# Altium PCB l4.pcbdoc
Units mil, origin at the board's own origin, x right, y up, seen from the top; angles counter-clockwise.
Board outline 4455 x 3235 mil, 2 copper layers (Top Layer, Bottom Layer); 4 components, 5 nets, 16 pads, 0 vias.
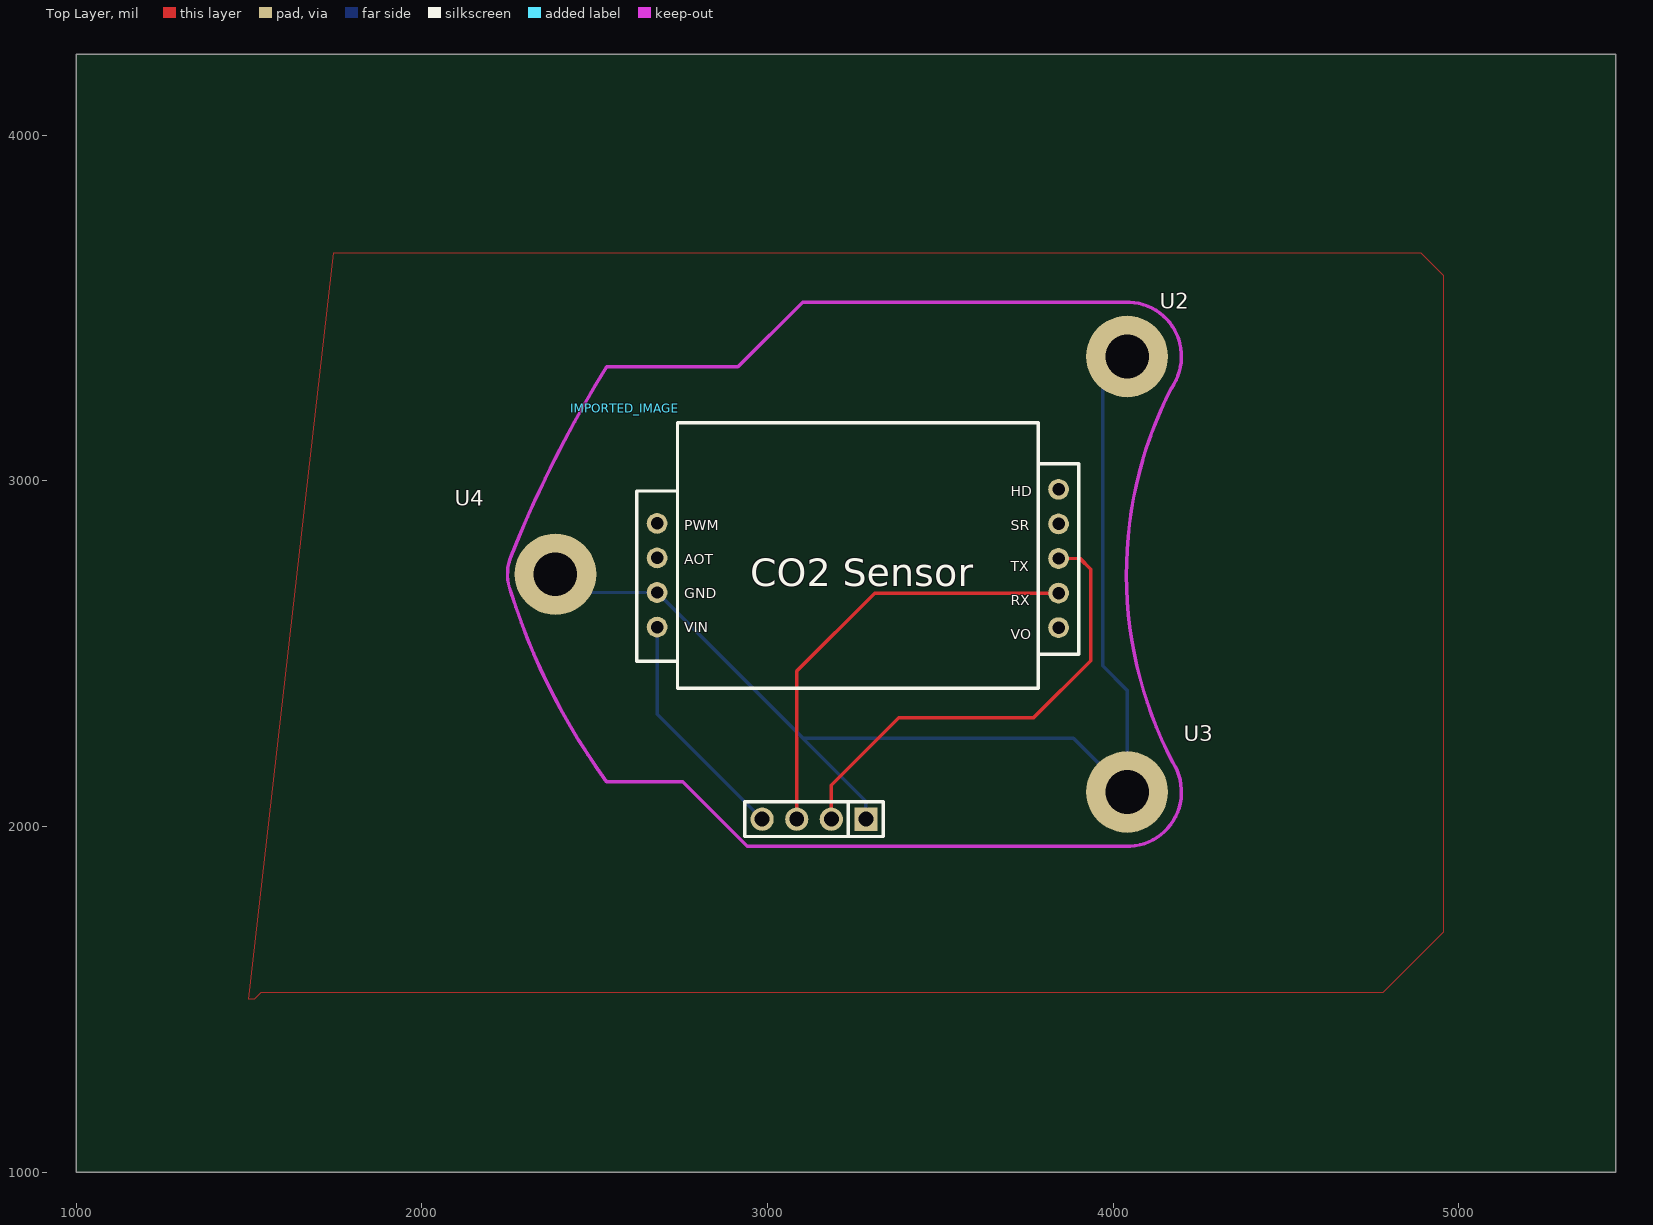
[diagram p0: Top Layer view]
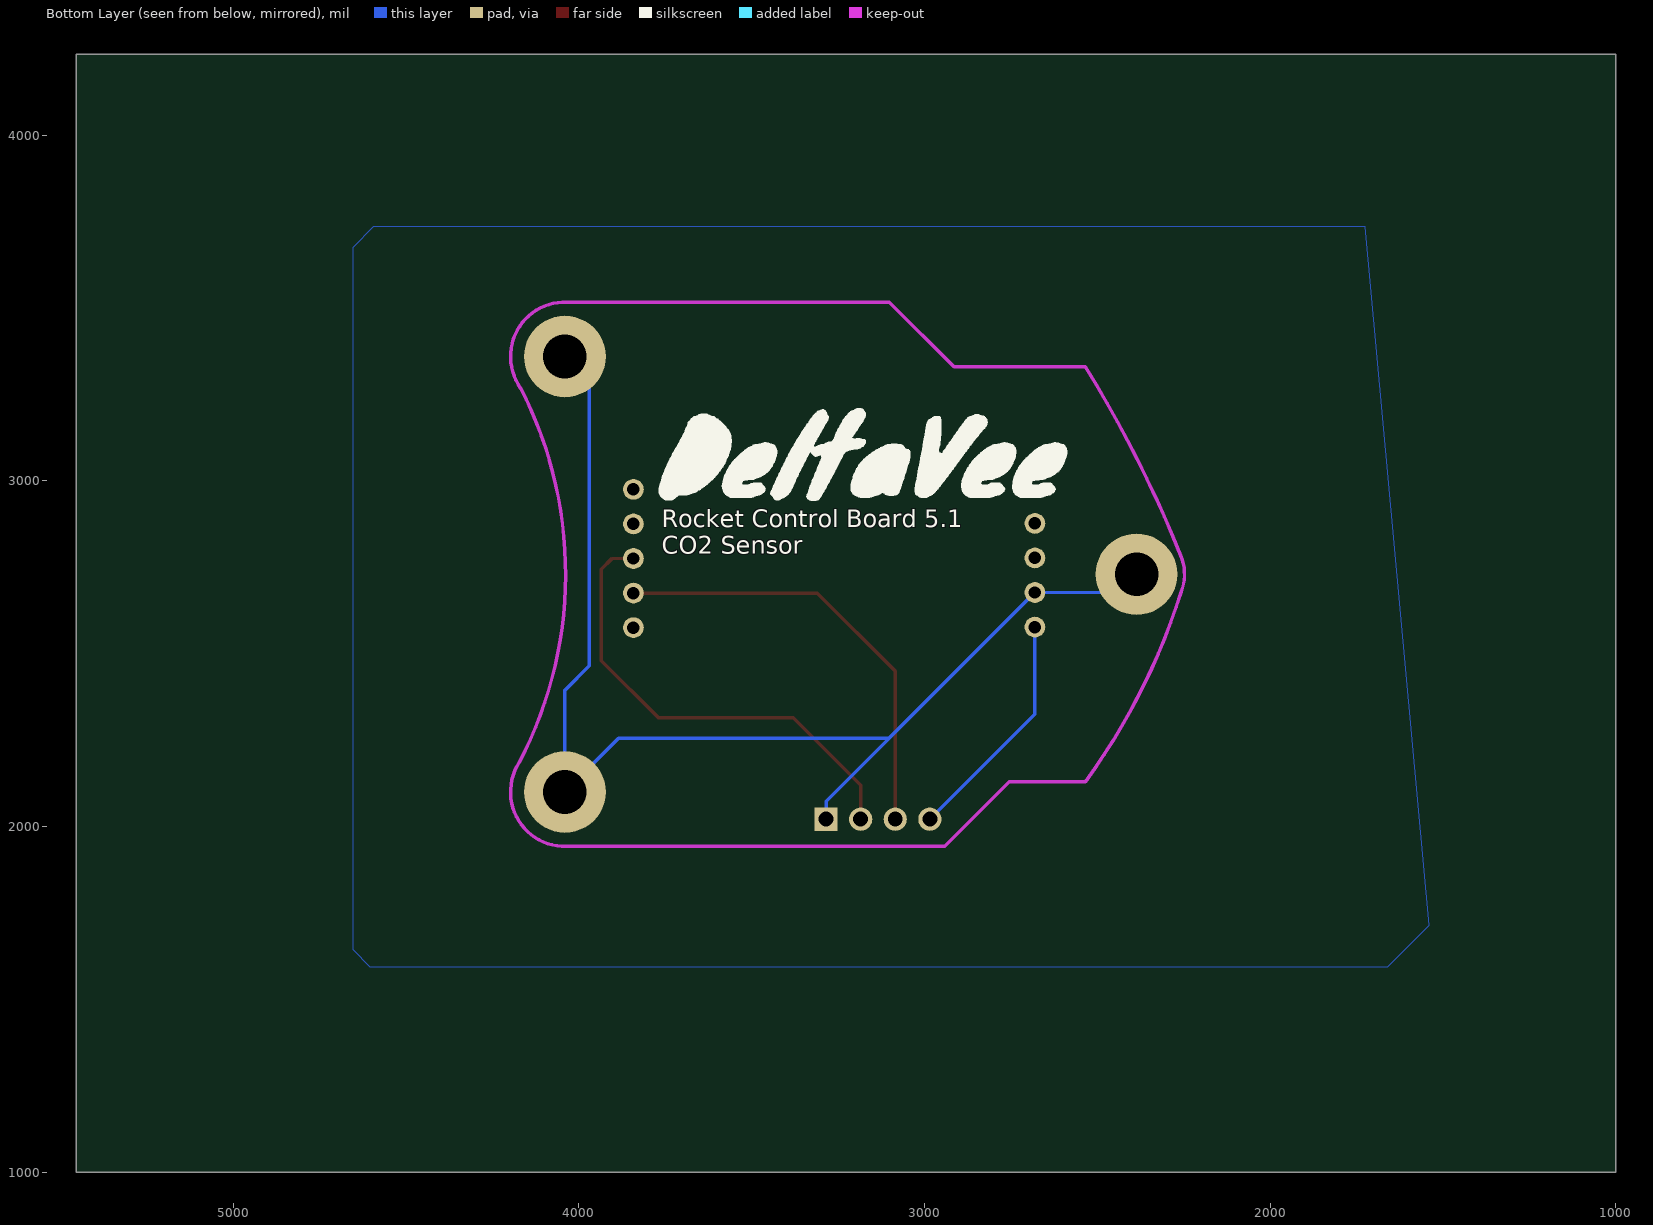
[diagram p1: Bottom Layer view, seen from below]

## Layer stack, top to bottom
Top Layer: signal copper (thickness not stored)
Dielectric: dielectric 12.6, FR-4, Dk 4.8
Bottom Layer: signal copper (thickness not stored)

## Board outline
5455,1000 1000,1000 1000,4235 5455,4235

## Components (designator, comment, footprint, x,y, rotation, side; value= is the part's Value field where it differs from the comment)
IMPORTED_IMAGE "IMPORTED_IMAGE" IMPORTED_IMAGE 2587.98,3210.15 r0 top
U2 "MH_M3" MH_M3_PCB 4040.51,3359.92 r0 top
U3 "MH_M3" MH_M3_PCB 4040.51,2100.08 r0 top
U4 "MH_M3" MH_M3_PCB 2386.97,2730 r0 top

## Footprints (in the part's own frame and the unit in brackets; to place one, negate y for a bottom-side part, rotate by r counter-clockwise, add the part's x,y. Pads: shape width x height; smd on the part's side, far side on the other; paste and mask are expansions set on the pad)
IMPORTED_IMAGE [mil]
MH_M3_PCB [mm]
  round 6 hole 3.2 paste+0 mask+0.051: 1(0,0)

## Free pads (board coordinates)
  rect 66.93x66.93 hole 43.31 paste+0 mask+2: 1(3285,2021.34)
  round 60 hole 36 paste+0 mask+2: 1(3842.36,2575.59) 2(3842.36,2675.59) 3(3842.36,2775.59) 4(3842.36,2875.59) 5(3842.36,2975.59) 6(2680.94,2577.17) 7(2680.94,2677.17) 8(2680.94,2777.17) 9(2680.94,2877.17)
  round 66.93 hole 43.31 paste+0 mask+2: 2(3185,2021.34) 3(3085,2021.34) 4(2985,2021.34)

## Nets (pads, with @x,y where several pads share a name; then routed paths per layer and width w, separated by ;. In a path a pad name is that pad's centre, name@x,y a point inside that pad or via, vN(x,y) a via of type N, cw(c..) or ccw(c..) an arc to the next point about the centre after c; other vN are vias at no path point)
+5V: pad.4@2985,2021.34 pad.6 | length 681.8
  Bottom Layer w10: pad.6 2680.94,2325.4 pad.4@2985,2021.34
GND: pad.1@3285,2021.34 pad.7 U2.1 U3.1 U4.1 | length 4138.8
  Bottom Layer w10: U4.1 2439.8,2677.17 pad.7 ; pad.1@3285,2021.34 3285,2073.11 pad.7 ; U2.1 3970,3289.41 3970,2465 4040.51,2394.49 U3.1 3885.59,2255 3395,2255 3103.11,2255 pad.7
S1: pad.2@3842.36,2675.59 pad.3@3085,2021.34 | length 1279.5
  Top Layer w10: pad.3@3085,2021.34 3085,2450 3310.59,2675.59 pad.2@3842.36,2675.59
S2: pad.2@3185,2021.34 pad.3@3842.36,2775.59 | length 1368.1
  Top Layer w10: pad.2@3185,2021.3 3185,2120 3380,2315 3770,2315 3935,2480 3935,2745 3904.4,2775.6 pad.3@3842.4,2775.6
S$525: 

## Polygon pours and split planes (outlines as drawn)
GND on Bottom Layer (solid): 1725,3735 4595,3735 4655,3675 4655,1645 4605,1595 1660,1595 1540,1715
GND on Top Layer (solid): 1745,3660 4890,3660 4955,3595 4955,1695 4780,1520 1535,1520 1515,1500 1500,1500

## Keep-outs
Keep-Out Layer:
  lines w10 net S$525: 2535,2130.01 cw(c4064.06,3246.1) 2257.88,2679.18 cw(c2386.96,2730.02) 2258.91,2783.38 cw(c5513.86,1482.29) 2534.99,3330.01 ; 4034.73,3517.31 cw(c4040.5,3359.93) 4168.53,3268.23 ccw(c5214.86,2731.03) 4172.89,2185.42 ; 4036.17,1942.68 ccw(c4040.5,2100.1) 4172.86,2185.43

## Silkscreen, mask and mechanical layers (free items; w line width, h text height)
Top Overlay:
  lines w10: 3234.07,2071.34 3234.07,1971.34 ; 3234.07,1971.34 2935,1971.34 2935,2071.34 3335,2071.34 3335,1971.34 3234.07,1971.34 ; 2621.89,2478.73 2740,2478.73 2740,2970.86 2621.89,2970.86 2621.89,2478.73 ; 2740,2400 2740,3167.7 3783.3,3167.7 3783.3,2400 2740,2400 ; 3783.31,2498.43 3901.42,2498.43 3901.42,3049.61 3783.31,3049.61 3783.31,2498.43
  text "HD" at 3704.57,2955.86 h30
  text "PWM" at 2759.69,2857.44 h30
  text "SR" at 3704.57,2857.44 h30
  text "AOT" at 2759.69,2759.01 h30
  text "TX" at 3704.57,2739.33 h30
  text "CO2 Sensor" at 2950,2695 h80
  text "GND" at 2759.69,2660.59 h30
  text "RX" at 3704.57,2640.9 h30
  text "VIN" at 2759.69,2562.16 h30
  text "VO" at 3704.57,2542.48 h30
Bottom Overlay:
  text "Rocket Control Board 5.1 / CO2 Sensor" at 3760,2789.41 h51.18
Document:
  lines w0.1: 3227.49,2617.49 3227.51,2617.51